# EAGLE board Panel (EAGLE 7.7.0)
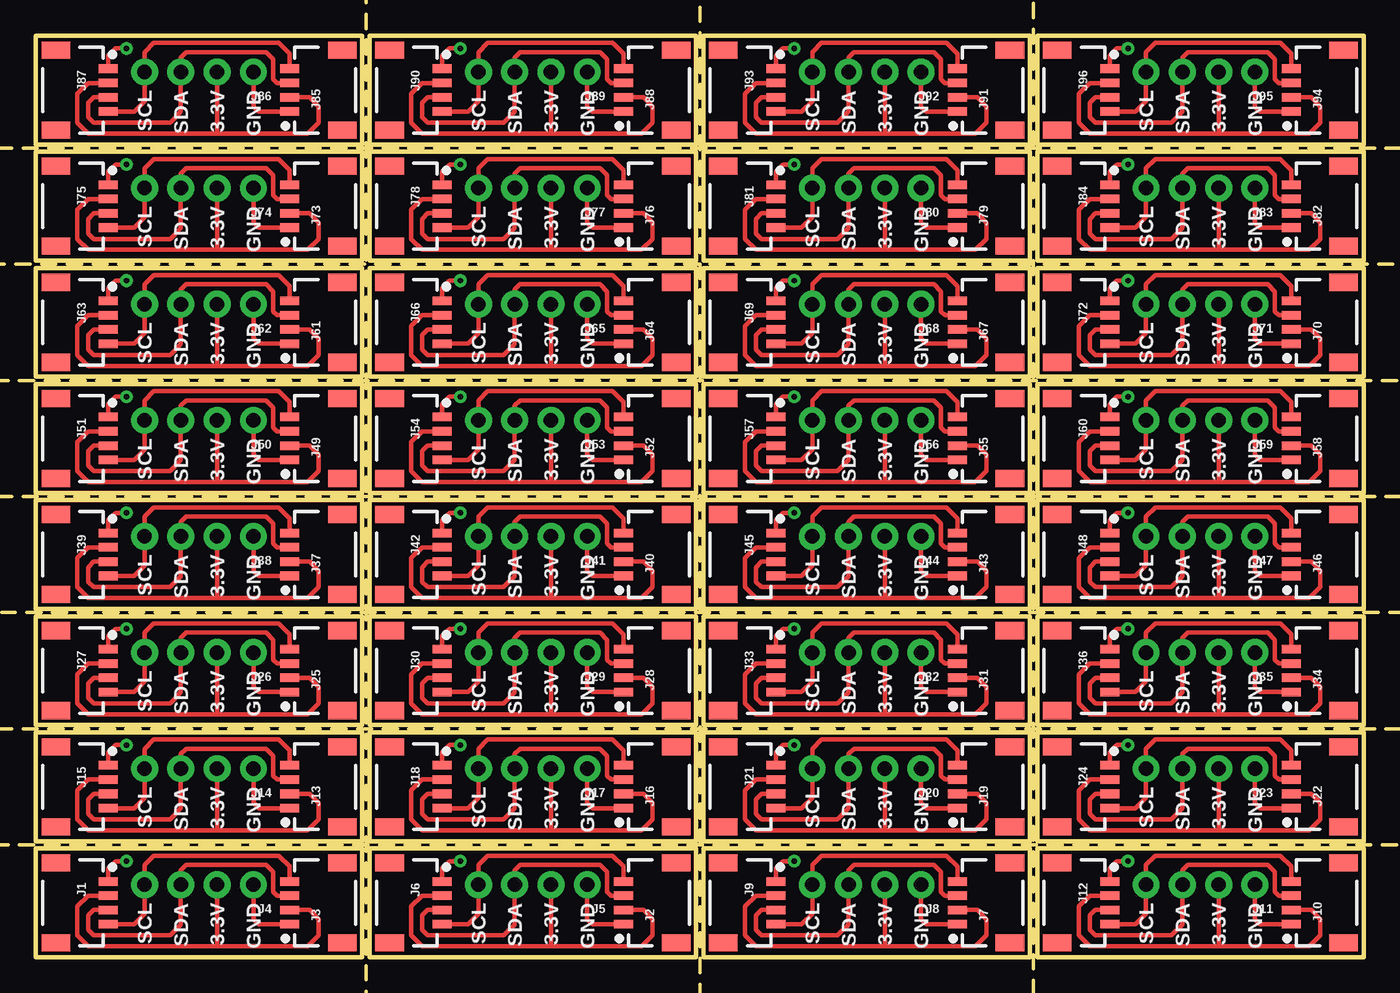
[diagram p0: board, top side]
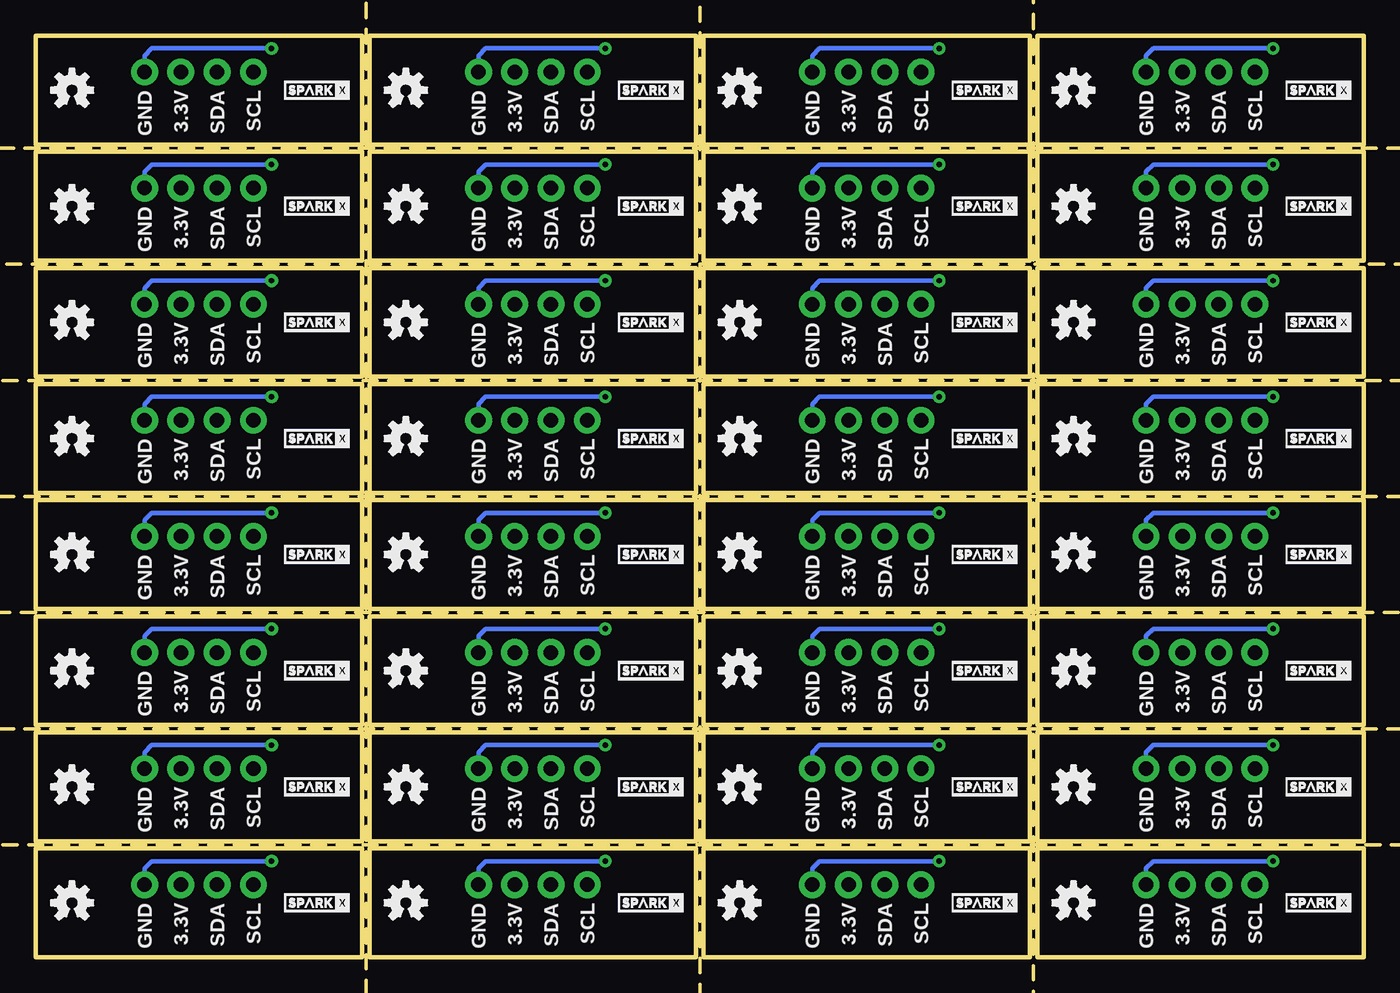
[diagram p1: board, bottom side, seen from below]

Size 92.96 x 64.52 mm. Coordinates in mm from the lower left corner, seen from the top.
Outline: 0,0 0,7.62 22.86,7.62 22.86,0 0,0
Outline: 23.37,0 23.37,7.62 46.23,7.62 46.23,0 23.37,0
Outline: 46.74,0 46.74,7.62 69.6,7.62 69.6,0 46.74,0
Outline: 70.1,0 70.1,7.62 92.96,7.62 92.96,0 70.1,0
Outline: 0,8.13 0,15.75 22.86,15.75 22.86,8.13 0,8.13
Outline: 23.37,8.13 23.37,15.75 46.23,15.75 46.23,8.13 23.37,8.13
Outline: 46.74,8.13 46.74,15.75 69.6,15.75 69.6,8.13 46.74,8.13
Outline: 70.1,8.13 70.1,15.75 92.96,15.75 92.96,8.13 70.1,8.13
Outline: 0,16.26 0,23.88 22.86,23.88 22.86,16.26 0,16.26
Outline: 23.37,16.26 23.37,23.88 46.23,23.88 46.23,16.26 23.37,16.26
Outline: 46.74,16.26 46.74,23.88 69.6,23.88 69.6,16.26 46.74,16.26
Outline: 70.1,16.26 70.1,23.88 92.96,23.88 92.96,16.26 70.1,16.26
Outline: 0,24.38 0,32 22.86,32 22.86,24.38 0,24.38
Outline: 23.37,24.38 23.37,32 46.23,32 46.23,24.38 23.37,24.38
Outline: 46.74,24.38 46.74,32 69.6,32 69.6,24.38 46.74,24.38
Outline: 70.1,24.38 70.1,32 92.96,32 92.96,24.38 70.1,24.38
Outline: 0,32.51 0,40.13 22.86,40.13 22.86,32.51 0,32.51
Outline: 23.37,32.51 23.37,40.13 46.23,40.13 46.23,32.51 23.37,32.51
Outline: 46.74,32.51 46.74,40.13 69.6,40.13 69.6,32.51 46.74,32.51
Outline: 70.1,32.51 70.1,40.13 92.96,40.13 92.96,32.51 70.1,32.51
Outline: 0,40.64 0,48.26 22.86,48.26 22.86,40.64 0,40.64
Outline: 23.37,40.64 23.37,48.26 46.23,48.26 46.23,40.64 23.37,40.64
Outline: 46.74,40.64 46.74,48.26 69.6,48.26 69.6,40.64 46.74,40.64
Outline: 70.1,40.64 70.1,48.26 92.96,48.26 92.96,40.64 70.1,40.64
Outline: 0,48.77 0,56.39 22.86,56.39 22.86,48.77 0,48.77
Outline: 23.37,48.77 23.37,56.39 46.23,56.39 46.23,48.77 23.37,48.77
Outline: 46.74,48.77 46.74,56.39 69.6,56.39 69.6,48.77 46.74,48.77
Outline: 70.1,48.77 70.1,56.39 92.96,56.39 92.96,48.77 70.1,48.77
Outline: 0,56.9 0,64.52 22.86,64.52 22.86,56.9 0,56.9
Outline: 23.37,56.9 23.37,64.52 46.23,64.52 46.23,56.9 23.37,56.9
Outline: 46.74,56.9 46.74,64.52 69.6,64.52 69.6,56.9 46.74,56.9
Outline: 70.1,56.9 70.1,64.52 92.96,64.52 92.96,56.9 70.1,56.9
Copper layers (1*16): Top 0.035mm / dielectric 1.5mm / Bottom 0.035mm
Design rules "SparkFun-2-layer-STANDARD": minimum track width 10mil, minimum drill 20mil, track to track 10mil, track to pad 8mil, pad to pad 8mil, via to via 10mil, smd to smd 8mil, copper to edge 8mil, drill to drill 8mil, minimum pad ring 10mil, minimum via ring 10mil, stop-mask expansion 4mil, vias tented up to drill 25mil, thermal gap 10mil
Milling: 607 lines

## Footprints (pad centres in the part's own frame; a part is rotated, then mirrored left to right if it is on the bottom)
1X04_1MM_RA = smd 0.6 x 1.35: 1 -1.5,0; 2 -0.5,0; 3 0.5,0; 4 1.5,0 | smd 1.2 x 2: NC1 2.8,-3.675; NC2 -2.8,-3.675
1X04_NO_SILK = drill 1.016 pad 1.88: 1 0,0; 2 2.54,0; 3 5.08,0; 4 7.62,0

## Placement (x,y rotation side)
J1  JST  [1X04_1MM_RA]  5.08,3.81 270 top
J2  JST  [1X04_1MM_RA]  41.15,3.81 90 top
J3  JST  [1X04_1MM_RA]  17.78,3.81 90 top
J4  PTH  [1X04_NO_SILK]  15.24,5.08 180 top
J5  PTH  [1X04_NO_SILK]  38.61,5.08 180 top
J6  JST  [1X04_1MM_RA]  28.45,3.81 270 top
J7  JST  [1X04_1MM_RA]  64.52,3.81 90 top
J8  PTH  [1X04_NO_SILK]  61.98,5.08 180 top
J9  JST  [1X04_1MM_RA]  51.82,3.81 270 top
J10  JST  [1X04_1MM_RA]  87.88,3.81 90 top
J11  PTH  [1X04_NO_SILK]  85.34,5.08 180 top
J12  JST  [1X04_1MM_RA]  75.18,3.81 270 top
J13  JST  [1X04_1MM_RA]  17.78,11.94 90 top
J14  PTH  [1X04_NO_SILK]  15.24,13.21 180 top
J15  JST  [1X04_1MM_RA]  5.08,11.94 270 top
J16  JST  [1X04_1MM_RA]  41.15,11.94 90 top
J17  PTH  [1X04_NO_SILK]  38.61,13.21 180 top
J18  JST  [1X04_1MM_RA]  28.45,11.94 270 top
J19  JST  [1X04_1MM_RA]  64.52,11.94 90 top
J20  PTH  [1X04_NO_SILK]  61.98,13.21 180 top
J21  JST  [1X04_1MM_RA]  51.82,11.94 270 top
J22  JST  [1X04_1MM_RA]  87.88,11.94 90 top
J23  PTH  [1X04_NO_SILK]  85.34,13.21 180 top
J24  JST  [1X04_1MM_RA]  75.18,11.94 270 top
J25  JST  [1X04_1MM_RA]  17.78,20.07 90 top
J26  PTH  [1X04_NO_SILK]  15.24,21.34 180 top
J27  JST  [1X04_1MM_RA]  5.08,20.07 270 top
J28  JST  [1X04_1MM_RA]  41.15,20.07 90 top
J29  PTH  [1X04_NO_SILK]  38.61,21.34 180 top
J30  JST  [1X04_1MM_RA]  28.45,20.07 270 top
J31  JST  [1X04_1MM_RA]  64.52,20.07 90 top
J32  PTH  [1X04_NO_SILK]  61.98,21.34 180 top
J33  JST  [1X04_1MM_RA]  51.82,20.07 270 top
J34  JST  [1X04_1MM_RA]  87.88,20.07 90 top
J35  PTH  [1X04_NO_SILK]  85.34,21.34 180 top
J36  JST  [1X04_1MM_RA]  75.18,20.07 270 top
J37  JST  [1X04_1MM_RA]  17.78,28.19 90 top
J38  PTH  [1X04_NO_SILK]  15.24,29.46 180 top
J39  JST  [1X04_1MM_RA]  5.08,28.19 270 top
J40  JST  [1X04_1MM_RA]  41.15,28.19 90 top
J41  PTH  [1X04_NO_SILK]  38.61,29.46 180 top
J42  JST  [1X04_1MM_RA]  28.45,28.19 270 top
J43  JST  [1X04_1MM_RA]  64.52,28.19 90 top
J44  PTH  [1X04_NO_SILK]  61.98,29.46 180 top
J45  JST  [1X04_1MM_RA]  51.82,28.19 270 top
J46  JST  [1X04_1MM_RA]  87.88,28.19 90 top
J47  PTH  [1X04_NO_SILK]  85.34,29.46 180 top
J48  JST  [1X04_1MM_RA]  75.18,28.19 270 top
J49  JST  [1X04_1MM_RA]  17.78,36.32 90 top
J50  PTH  [1X04_NO_SILK]  15.24,37.59 180 top
J51  JST  [1X04_1MM_RA]  5.08,36.32 270 top
J52  JST  [1X04_1MM_RA]  41.15,36.32 90 top
J53  PTH  [1X04_NO_SILK]  38.61,37.59 180 top
J54  JST  [1X04_1MM_RA]  28.45,36.32 270 top
J55  JST  [1X04_1MM_RA]  64.52,36.32 90 top
J56  PTH  [1X04_NO_SILK]  61.98,37.59 180 top
J57  JST  [1X04_1MM_RA]  51.82,36.32 270 top
J58  JST  [1X04_1MM_RA]  87.88,36.32 90 top
J59  PTH  [1X04_NO_SILK]  85.34,37.59 180 top
J60  JST  [1X04_1MM_RA]  75.18,36.32 270 top
J61  JST  [1X04_1MM_RA]  17.78,44.45 90 top
J62  PTH  [1X04_NO_SILK]  15.24,45.72 180 top
J63  JST  [1X04_1MM_RA]  5.08,44.45 270 top
J64  JST  [1X04_1MM_RA]  41.15,44.45 90 top
J65  PTH  [1X04_NO_SILK]  38.61,45.72 180 top
J66  JST  [1X04_1MM_RA]  28.45,44.45 270 top
J67  JST  [1X04_1MM_RA]  64.52,44.45 90 top
J68  PTH  [1X04_NO_SILK]  61.98,45.72 180 top
J69  JST  [1X04_1MM_RA]  51.82,44.45 270 top
J70  JST  [1X04_1MM_RA]  87.88,44.45 90 top
J71  PTH  [1X04_NO_SILK]  85.34,45.72 180 top
J72  JST  [1X04_1MM_RA]  75.18,44.45 270 top
J73  JST  [1X04_1MM_RA]  17.78,52.58 90 top
J74  PTH  [1X04_NO_SILK]  15.24,53.85 180 top
J75  JST  [1X04_1MM_RA]  5.08,52.58 270 top
J76  JST  [1X04_1MM_RA]  41.15,52.58 90 top
J77  PTH  [1X04_NO_SILK]  38.61,53.85 180 top
J78  JST  [1X04_1MM_RA]  28.45,52.58 270 top
J79  JST  [1X04_1MM_RA]  64.52,52.58 90 top
J80  PTH  [1X04_NO_SILK]  61.98,53.85 180 top
J81  JST  [1X04_1MM_RA]  51.82,52.58 270 top
J82  JST  [1X04_1MM_RA]  87.88,52.58 90 top
J83  PTH  [1X04_NO_SILK]  85.34,53.85 180 top
J84  JST  [1X04_1MM_RA]  75.18,52.58 270 top
J85  JST  [1X04_1MM_RA]  17.78,60.71 90 top
J86  PTH  [1X04_NO_SILK]  15.24,61.98 180 top
J87  JST  [1X04_1MM_RA]  5.08,60.71 270 top
J88  JST  [1X04_1MM_RA]  41.15,60.71 90 top
J89  PTH  [1X04_NO_SILK]  38.61,61.98 180 top
J90  JST  [1X04_1MM_RA]  28.45,60.71 270 top
J91  JST  [1X04_1MM_RA]  64.52,60.71 90 top
J92  PTH  [1X04_NO_SILK]  61.98,61.98 180 top
J93  JST  [1X04_1MM_RA]  51.82,60.71 270 top
J94  JST  [1X04_1MM_RA]  87.88,60.71 90 top
J95  PTH  [1X04_NO_SILK]  85.34,61.98 180 top
J96  JST  [1X04_1MM_RA]  75.18,60.71 270 top
LOGO1  OSHW-LOGOS  [OSHW-LOGO-S]  43.69,3.81 0 bottom
LOGO2  OSHW-LOGOS  [OSHW-LOGO-S]  67.06,3.81 0 bottom
LOGO3  OSHW-LOGOS  [OSHW-LOGO-S]  90.42,3.81 0 bottom
LOGO4  OSHW-LOGOS  [OSHW-LOGO-S]  20.32,3.81 0 bottom
LOGO5  OSHW-LOGOS  [OSHW-LOGO-S]  20.32,11.94 0 bottom
LOGO6  OSHW-LOGOS  [OSHW-LOGO-S]  43.69,11.94 0 bottom
LOGO7  OSHW-LOGOS  [OSHW-LOGO-S]  67.06,11.94 0 bottom
LOGO8  OSHW-LOGOS  [OSHW-LOGO-S]  90.42,11.94 0 bottom
LOGO9  OSHW-LOGOS  [OSHW-LOGO-S]  20.32,20.07 0 bottom
LOGO10  OSHW-LOGOS  [OSHW-LOGO-S]  43.69,20.07 0 bottom
LOGO11  OSHW-LOGOS  [OSHW-LOGO-S]  67.06,20.07 0 bottom
LOGO12  OSHW-LOGOS  [OSHW-LOGO-S]  90.42,20.07 0 bottom
LOGO13  OSHW-LOGOS  [OSHW-LOGO-S]  20.32,28.19 0 bottom
LOGO14  OSHW-LOGOS  [OSHW-LOGO-S]  43.69,28.19 0 bottom
LOGO15  OSHW-LOGOS  [OSHW-LOGO-S]  67.06,28.19 0 bottom
LOGO16  OSHW-LOGOS  [OSHW-LOGO-S]  90.42,28.19 0 bottom
LOGO17  OSHW-LOGOS  [OSHW-LOGO-S]  20.32,36.32 0 bottom
LOGO18  OSHW-LOGOS  [OSHW-LOGO-S]  43.69,36.32 0 bottom
LOGO19  OSHW-LOGOS  [OSHW-LOGO-S]  67.06,36.32 0 bottom
LOGO20  OSHW-LOGOS  [OSHW-LOGO-S]  90.42,36.32 0 bottom
LOGO21  OSHW-LOGOS  [OSHW-LOGO-S]  20.32,44.45 0 bottom
LOGO22  OSHW-LOGOS  [OSHW-LOGO-S]  43.69,44.45 0 bottom
LOGO23  OSHW-LOGOS  [OSHW-LOGO-S]  67.06,44.45 0 bottom
LOGO24  OSHW-LOGOS  [OSHW-LOGO-S]  90.42,44.45 0 bottom
LOGO25  OSHW-LOGOS  [OSHW-LOGO-S]  20.32,52.58 0 bottom
LOGO26  OSHW-LOGOS  [OSHW-LOGO-S]  43.69,52.58 0 bottom
LOGO27  OSHW-LOGOS  [OSHW-LOGO-S]  67.06,52.58 0 bottom
LOGO28  OSHW-LOGOS  [OSHW-LOGO-S]  90.42,52.58 0 bottom
LOGO29  OSHW-LOGOS  [OSHW-LOGO-S]  20.32,60.71 0 bottom
LOGO30  OSHW-LOGOS  [OSHW-LOGO-S]  43.69,60.71 0 bottom
LOGO31  OSHW-LOGOS  [OSHW-LOGO-S]  67.06,60.71 0 bottom
LOGO32  OSHW-LOGOS  [OSHW-LOGO-S]  90.42,60.71 0 bottom
U$1  SPARKX-LOGO2  [SPARKX-TINY]  3.17,3.81 0 bottom
U$2  SPARKX-LOGO2  [SPARKX-TINY]  26.54,3.81 0 bottom
U$3  SPARKX-LOGO2  [SPARKX-TINY]  49.91,3.81 0 bottom
U$4  SPARKX-LOGO2  [SPARKX-TINY]  73.28,3.81 0 bottom
U$5  SPARKX-LOGO2  [SPARKX-TINY]  3.17,11.94 0 bottom
U$6  SPARKX-LOGO2  [SPARKX-TINY]  26.54,11.94 0 bottom
U$7  SPARKX-LOGO2  [SPARKX-TINY]  49.91,11.94 0 bottom
U$8  SPARKX-LOGO2  [SPARKX-TINY]  73.28,11.94 0 bottom
U$9  SPARKX-LOGO2  [SPARKX-TINY]  3.17,20.07 0 bottom
U$10  SPARKX-LOGO2  [SPARKX-TINY]  26.54,20.07 0 bottom
U$11  SPARKX-LOGO2  [SPARKX-TINY]  49.91,20.07 0 bottom
U$12  SPARKX-LOGO2  [SPARKX-TINY]  73.28,20.07 0 bottom
U$13  SPARKX-LOGO2  [SPARKX-TINY]  3.17,28.19 0 bottom
U$14  SPARKX-LOGO2  [SPARKX-TINY]  26.54,28.19 0 bottom
U$15  SPARKX-LOGO2  [SPARKX-TINY]  49.91,28.19 0 bottom
U$16  SPARKX-LOGO2  [SPARKX-TINY]  73.28,28.19 0 bottom
U$17  SPARKX-LOGO2  [SPARKX-TINY]  3.17,36.32 0 bottom
U$18  SPARKX-LOGO2  [SPARKX-TINY]  26.54,36.32 0 bottom
U$19  SPARKX-LOGO2  [SPARKX-TINY]  49.91,36.32 0 bottom
U$20  SPARKX-LOGO2  [SPARKX-TINY]  73.28,36.32 0 bottom
U$21  SPARKX-LOGO2  [SPARKX-TINY]  3.17,44.45 0 bottom
U$22  SPARKX-LOGO2  [SPARKX-TINY]  26.54,44.45 0 bottom
U$23  SPARKX-LOGO2  [SPARKX-TINY]  49.91,44.45 0 bottom
U$24  SPARKX-LOGO2  [SPARKX-TINY]  73.28,44.45 0 bottom
U$25  SPARKX-LOGO2  [SPARKX-TINY]  3.17,52.58 0 bottom
U$26  SPARKX-LOGO2  [SPARKX-TINY]  26.54,52.58 0 bottom
U$27  SPARKX-LOGO2  [SPARKX-TINY]  49.91,52.58 0 bottom
U$28  SPARKX-LOGO2  [SPARKX-TINY]  73.28,52.58 0 bottom
U$29  SPARKX-LOGO2  [SPARKX-TINY]  3.17,60.71 0 bottom
U$30  SPARKX-LOGO2  [SPARKX-TINY]  26.54,60.71 0 bottom
U$31  SPARKX-LOGO2  [SPARKX-TINY]  49.91,60.71 0 bottom
U$32  SPARKX-LOGO2  [SPARKX-TINY]  73.28,60.71 0 bottom

## Library data of the parts
J1-J96 U$1-U$32 = SparkX
LOGO1-LOGO32 = SparkFun-Aesthetics

## Nets
3.3V: J1.2 J3.2 J4.2
3.3V1: J2.2 J5.2 J6.2
3.3V2: J7.2 J8.2 J9.2
3.3V3: J10.2 J11.2 J12.2
3.3V4: J13.2 J14.2 J15.2
3.3V5: J16.2 J17.2 J18.2
3.3V6: J19.2 J20.2 J21.2
3.3V7: J22.2 J23.2 J24.2
3.3V8: J25.2 J26.2 J27.2
3.3V9: J28.2 J29.2 J30.2
3.3V10: J31.2 J32.2 J33.2
3.3V11: J34.2 J35.2 J36.2
3.3V12: J37.2 J38.2 J39.2
3.3V13: J40.2 J41.2 J42.2
3.3V14: J43.2 J44.2 J45.2
3.3V15: J46.2 J47.2 J48.2
3.3V16: J49.2 J50.2 J51.2
3.3V17: J52.2 J53.2 J54.2
3.3V18: J55.2 J56.2 J57.2
3.3V19: J58.2 J59.2 J60.2
3.3V20: J61.2 J62.2 J63.2
3.3V21: J64.2 J65.2 J66.2
3.3V22: J67.2 J68.2 J69.2
3.3V23: J70.2 J71.2 J72.2
3.3V24: J73.2 J74.2 J75.2
3.3V25: J76.2 J77.2 J78.2
3.3V26: J79.2 J80.2 J81.2
3.3V27: J82.2 J83.2 J84.2
3.3V28: J85.2 J86.2 J87.2
3.3V29: J88.2 J89.2 J90.2
3.3V30: J91.2 J92.2 J93.2
3.3V31: J94.2 J95.2 J96.2
GND: J1.1 J3.1 J4.1
GND1: J2.1 J5.1 J6.1
GND2: J7.1 J8.1 J9.1
GND3: J10.1 J11.1 J12.1
GND4: J13.1 J14.1 J15.1
GND5: J16.1 J17.1 J18.1
GND6: J19.1 J20.1 J21.1
GND7: J22.1 J23.1 J24.1
GND8: J25.1 J26.1 J27.1
GND9: J28.1 J29.1 J30.1
GND10: J31.1 J32.1 J33.1
GND11: J34.1 J35.1 J36.1
GND12: J37.1 J38.1 J39.1
GND13: J40.1 J41.1 J42.1
GND14: J43.1 J44.1 J45.1
GND15: J46.1 J47.1 J48.1
GND16: J49.1 J50.1 J51.1
GND17: J52.1 J53.1 J54.1
GND18: J55.1 J56.1 J57.1
GND19: J58.1 J59.1 J60.1
GND20: J61.1 J62.1 J63.1
GND21: J64.1 J65.1 J66.1
GND22: J67.1 J68.1 J69.1
GND23: J70.1 J71.1 J72.1
GND24: J73.1 J74.1 J75.1
GND25: J76.1 J77.1 J78.1
GND26: J79.1 J80.1 J81.1
GND27: J82.1 J83.1 J84.1
GND28: J85.1 J86.1 J87.1
GND29: J88.1 J89.1 J90.1
GND30: J91.1 J92.1 J93.1
GND31: J94.1 J95.1 J96.1
SCL: J1.4 J3.4 J4.4
SCL1: J2.4 J5.4 J6.4
SCL2: J7.4 J8.4 J9.4
SCL3: J10.4 J11.4 J12.4
SCL4: J13.4 J14.4 J15.4
SCL5: J16.4 J17.4 J18.4
SCL6: J19.4 J20.4 J21.4
SCL7: J22.4 J23.4 J24.4
SCL8: J25.4 J26.4 J27.4
SCL9: J28.4 J29.4 J30.4
SCL10: J31.4 J32.4 J33.4
SCL11: J34.4 J35.4 J36.4
SCL12: J37.4 J38.4 J39.4
SCL13: J40.4 J41.4 J42.4
SCL14: J43.4 J44.4 J45.4
SCL15: J46.4 J47.4 J48.4
SCL16: J49.4 J50.4 J51.4
SCL17: J52.4 J53.4 J54.4
SCL18: J55.4 J56.4 J57.4
SCL19: J58.4 J59.4 J60.4
SCL20: J61.4 J62.4 J63.4
SCL21: J64.4 J65.4 J66.4
SCL22: J67.4 J68.4 J69.4
SCL23: J70.4 J71.4 J72.4
SCL24: J73.4 J74.4 J75.4
SCL25: J76.4 J77.4 J78.4
SCL26: J79.4 J80.4 J81.4
SCL27: J82.4 J83.4 J84.4
SCL28: J85.4 J86.4 J87.4
SCL29: J88.4 J89.4 J90.4
SCL30: J91.4 J92.4 J93.4
SCL31: J94.4 J95.4 J96.4
SDA: J1.3 J3.3 J4.3
SDA1: J2.3 J5.3 J6.3
SDA2: J7.3 J8.3 J9.3
SDA3: J10.3 J11.3 J12.3
SDA4: J13.3 J14.3 J15.3
SDA5: J16.3 J17.3 J18.3
SDA6: J19.3 J20.3 J21.3
SDA7: J22.3 J23.3 J24.3
SDA8: J25.3 J26.3 J27.3
SDA9: J28.3 J29.3 J30.3
SDA10: J31.3 J32.3 J33.3
SDA11: J34.3 J35.3 J36.3
SDA12: J37.3 J38.3 J39.3
SDA13: J40.3 J41.3 J42.3
SDA14: J43.3 J44.3 J45.3
SDA15: J46.3 J47.3 J48.3
SDA16: J49.3 J50.3 J51.3
SDA17: J52.3 J53.3 J54.3
SDA18: J55.3 J56.3 J57.3
SDA19: J58.3 J59.3 J60.3
SDA20: J61.3 J62.3 J63.3
SDA21: J64.3 J65.3 J66.3
SDA22: J67.3 J68.3 J69.3
SDA23: J70.3 J71.3 J72.3
SDA24: J73.3 J74.3 J75.3
SDA25: J76.3 J77.3 J78.3
SDA26: J79.3 J80.3 J81.3
SDA27: J82.3 J83.3 J84.3
SDA28: J85.3 J86.3 J87.3
SDA29: J88.3 J89.3 J90.3
SDA30: J91.3 J92.3 J93.3
SDA31: J94.3 J95.3 J96.3

## Tracks (layer width: path | path; a pad name or v marks a point on that pad's centre or on a via)
3.3V
  Top 0.305: J1.2 3.67,4.31 2.92,3.56 2.92,1.52 3.68,0.76 12.7,0.76 | 12.7,0.76 19.05,0.76 19.81,1.52 19.81,2.67 19.17,3.31 J3.2 | J4.2 12.7,3.3 | 12.71,3.31 12.7,3.3 | 12.7,3.3 12.7,0.76
3.3V1
  Top 0.305: J6.2 27.04,4.31 26.29,3.56 26.29,1.52 27.05,0.76 36.07,0.76 | 36.07,0.76 42.42,0.76 43.18,1.52 43.18,2.67 42.54,3.31 J2.2 | J5.2 36.07,3.3 | 36.08,3.31 36.07,3.3 | 36.07,3.3 36.07,0.76
3.3V2
  Top 0.305: J9.2 50.41,4.31 49.66,3.56 49.66,1.52 50.42,0.76 59.44,0.76 | 59.44,0.76 65.79,0.76 66.55,1.52 66.55,2.67 65.91,3.31 J7.2 | J8.2 59.44,3.3 | 59.44,3.31 59.44,3.3 | 59.44,3.3 59.44,0.76
3.3V3
  Top 0.305: J12.2 73.78,4.31 73.03,3.56 73.03,1.52 73.79,0.76 82.8,0.76 | 82.8,0.76 89.15,0.76 89.92,1.52 89.92,2.67 89.27,3.31 J10.2 | J11.2 82.8,3.3 | 82.81,3.31 82.8,3.3 | 82.8,3.3 82.8,0.76
3.3V4
  Top 0.305: J15.2 3.67,12.44 2.92,11.68 2.92,9.65 3.68,8.89 12.7,8.89 | 12.7,8.89 19.05,8.89 19.81,9.65 19.81,10.79 19.17,11.44 J13.2 | J14.2 12.7,11.43 | 12.71,11.44 12.7,11.43 | 12.7,11.43 12.7,8.89
3.3V5
  Top 0.305: J18.2 27.04,12.44 26.29,11.68 26.29,9.65 27.05,8.89 36.07,8.89 | 36.07,8.89 42.42,8.89 43.18,9.65 43.18,10.79 42.54,11.44 J16.2 | J17.2 36.07,11.43 | 36.08,11.44 36.07,11.43 | 36.07,11.43 36.07,8.89
3.3V6
  Top 0.305: J21.2 50.41,12.44 49.66,11.68 49.66,9.65 50.42,8.89 59.44,8.89 | 59.44,8.89 65.79,8.89 66.55,9.65 66.55,10.79 65.91,11.44 J19.2 | J20.2 59.44,11.43 | 59.44,11.44 59.44,11.43 | 59.44,11.43 59.44,8.89
3.3V7
  Top 0.305: J24.2 73.78,12.44 73.03,11.68 73.03,9.65 73.79,8.89 82.8,8.89 | 82.8,8.89 89.15,8.89 89.92,9.65 89.92,10.79 89.27,11.44 J22.2 | J23.2 82.8,11.43 | 82.81,11.44 82.8,11.43 | 82.8,11.43 82.8,8.89
3.3V8
  Top 0.305: J27.2 3.67,20.57 2.92,19.81 2.92,17.78 3.68,17.02 12.7,17.02 | 12.7,17.02 19.05,17.02 19.81,17.78 19.81,18.92 19.17,19.57 J25.2 | J26.2 12.7,19.56 | 12.71,19.57 12.7,19.56 | 12.7,19.56 12.7,17.02
3.3V9
  Top 0.305: J30.2 27.04,20.57 26.29,19.81 26.29,17.78 27.05,17.02 36.07,17.02 | 36.07,17.02 42.42,17.02 43.18,17.78 43.18,18.92 42.54,19.57 J28.2 | J29.2 36.07,19.56 | 36.08,19.57 36.07,19.56 | 36.07,19.56 36.07,17.02
3.3V10
  Top 0.305: J33.2 50.41,20.57 49.66,19.81 49.66,17.78 50.42,17.02 59.44,17.02 | 59.44,17.02 65.79,17.02 66.55,17.78 66.55,18.92 65.91,19.57 J31.2 | J32.2 59.44,19.56 | 59.44,19.57 59.44,19.56 | 59.44,19.56 59.44,17.02
3.3V11
  Top 0.305: J36.2 73.78,20.57 73.03,19.81 73.03,17.78 73.79,17.02 82.8,17.02 | 82.8,17.02 89.15,17.02 89.92,17.78 89.92,18.92 89.27,19.57 J34.2 | J35.2 82.8,19.56 | 82.81,19.57 82.8,19.56 | 82.8,19.56 82.8,17.02
3.3V12
  Top 0.305: J39.2 3.67,28.69 2.92,27.94 2.92,25.91 3.68,25.15 12.7,25.15 | 12.7,25.15 19.05,25.15 19.81,25.91 19.81,27.05 19.17,27.69 J37.2 | J38.2 12.7,27.69 | 12.71,27.69 12.7,27.69 | 12.7,27.69 12.7,25.15
3.3V13
  Top 0.305: J42.2 27.04,28.69 26.29,27.94 26.29,25.91 27.05,25.15 36.07,25.15 | 36.07,25.15 42.42,25.15 43.18,25.91 43.18,27.05 42.54,27.69 J40.2 | J41.2 36.07,27.69 | 36.08,27.69 36.07,27.69 | 36.07,27.69 36.07,25.15
3.3V14
  Top 0.305: J45.2 50.41,28.69 49.66,27.94 49.66,25.91 50.42,25.15 59.44,25.15 | 59.44,25.15 65.79,25.15 66.55,25.91 66.55,27.05 65.91,27.69 J43.2 | J44.2 59.44,27.69 | 59.44,27.69 | 59.44,27.69 59.44,25.15
3.3V15
  Top 0.305: J48.2 73.78,28.69 73.03,27.94 73.03,25.91 73.79,25.15 82.8,25.15 | 82.8,25.15 89.15,25.15 89.92,25.91 89.92,27.05 89.27,27.69 J46.2 | J47.2 82.8,27.69 | 82.81,27.69 82.8,27.69 | 82.8,27.69 82.8,25.15
3.3V16
  Top 0.305: J51.2 3.67,36.82 2.92,36.07 2.92,34.04 3.68,33.27 12.7,33.27 | 12.7,33.27 19.05,33.27 19.81,34.04 19.81,35.18 19.17,35.82 J49.2 | J50.2 12.7,35.81 | 12.71,35.82 12.7,35.81 | 12.7,35.81 12.7,33.27
3.3V17
  Top 0.305: J54.2 27.04,36.82 26.29,36.07 26.29,34.04 27.05,33.27 36.07,33.27 | 36.07,33.27 42.42,33.27 43.18,34.04 43.18,35.18 42.54,35.82 J52.2 | J53.2 36.07,35.81 | 36.08,35.82 36.07,35.81 | 36.07,35.81 36.07,33.27
3.3V18
  Top 0.305: J57.2 50.41,36.82 49.66,36.07 49.66,34.04 50.42,33.27 59.44,33.27 | 59.44,33.27 65.79,33.27 66.55,34.04 66.55,35.18 65.91,35.82 J55.2 | J56.2 59.44,35.81 | 59.44,35.82 59.44,35.81 | 59.44,35.81 59.44,33.27
3.3V19
  Top 0.305: J60.2 73.78,36.82 73.03,36.07 73.03,34.04 73.79,33.27 82.8,33.27 | 82.8,33.27 89.15,33.27 89.92,34.04 89.92,35.18 89.27,35.82 J58.2 | J59.2 82.8,35.81 | 82.81,35.82 82.8,35.81 | 82.8,35.81 82.8,33.27
3.3V20
  Top 0.305: J63.2 3.67,44.95 2.92,44.2 2.92,42.16 3.68,41.4 12.7,41.4 | 12.7,41.4 19.05,41.4 19.81,42.16 19.81,43.31 19.17,43.95 J61.2 | J62.2 12.7,43.94 | 12.71,43.95 12.7,43.94 | 12.7,43.94 12.7,41.4
3.3V21
  Top 0.305: J66.2 27.04,44.95 26.29,44.2 26.29,42.16 27.05,41.4 36.07,41.4 | 36.07,41.4 42.42,41.4 43.18,42.16 43.18,43.31 42.54,43.95 J64.2 | J65.2 36.07,43.94 | 36.08,43.95 36.07,43.94 | 36.07,43.94 36.07,41.4
3.3V22
  Top 0.305: J69.2 50.41,44.95 49.66,44.2 49.66,42.16 50.42,41.4 59.44,41.4 | 59.44,41.4 65.79,41.4 66.55,42.16 66.55,43.31 65.91,43.95 J67.2 | J68.2 59.44,43.94 | 59.44,43.95 59.44,43.94 | 59.44,43.94 59.44,41.4
3.3V23
  Top 0.305: J72.2 73.78,44.95 73.03,44.2 73.03,42.16 73.79,41.4 82.8,41.4 | 82.8,41.4 89.15,41.4 89.92,42.16 89.92,43.31 89.27,43.95 J70.2 | J71.2 82.8,43.94 | 82.81,43.95 82.8,43.94 | 82.8,43.94 82.8,41.4
3.3V24
  Top 0.305: J75.2 3.67,53.08 2.92,52.32 2.92,50.29 3.68,49.53 12.7,49.53 | 12.7,49.53 19.05,49.53 19.81,50.29 19.81,51.44 19.17,52.08 J73.2 | J74.2 12.7,52.07 | 12.71,52.08 12.7,52.07 | 12.7,52.07 12.7,49.53
3.3V25
  Top 0.305: J78.2 27.04,53.08 26.29,52.32 26.29,50.29 27.05,49.53 36.07,49.53 | 36.07,49.53 42.42,49.53 43.18,50.29 43.18,51.44 42.54,52.08 J76.2 | J77.2 36.07,52.07 | 36.08,52.08 36.07,52.07 | 36.07,52.07 36.07,49.53
3.3V26
  Top 0.305: J81.2 50.41,53.08 49.66,52.32 49.66,50.29 50.42,49.53 59.44,49.53 | 59.44,49.53 65.79,49.53 66.55,50.29 66.55,51.44 65.91,52.08 J79.2 | J80.2 59.44,52.07 | 59.44,52.08 59.44,52.07 | 59.44,52.07 59.44,49.53
3.3V27
  Top 0.305: J84.2 73.78,53.08 73.03,52.32 73.03,50.29 73.79,49.53 82.8,49.53 | 82.8,49.53 89.15,49.53 89.92,50.29 89.92,51.44 89.27,52.08 J82.2 | J83.2 82.8,52.07 | 82.81,52.08 82.8,52.07 | 82.8,52.07 82.8,49.53
3.3V28
  Top 0.305: J87.2 3.67,61.21 2.92,60.45 2.92,58.42 3.68,57.66 12.7,57.66 | 12.7,57.66 19.05,57.66 19.81,58.42 19.81,59.56 19.17,60.21 J85.2 | J86.2 12.7,60.2 | 12.71,60.21 12.7,60.2 | 12.7,60.2 12.7,57.66
3.3V29
  Top 0.305: J90.2 27.04,61.21 26.29,60.45 26.29,58.42 27.05,57.66 36.07,57.66 | 36.07,57.66 42.42,57.66 43.18,58.42 43.18,59.56 42.54,60.21 J88.2 | J89.2 36.07,60.2 | 36.08,60.21 36.07,60.2 | 36.07,60.2 36.07,57.66
3.3V30
  Top 0.305: J93.2 50.41,61.21 49.66,60.45 49.66,58.42 50.42,57.66 59.44,57.66 | 59.44,57.66 65.79,57.66 66.55,58.42 66.55,59.56 65.91,60.21 J91.2 | J92.2 59.44,60.2 | 59.44,60.21 59.44,60.2 | 59.44,60.2 59.44,57.66
3.3V31
  Top 0.305: J96.2 73.78,61.21 73.03,60.45 73.03,58.42 73.79,57.66 82.8,57.66 | 82.8,57.66 89.15,57.66 89.92,58.42 89.92,59.56 89.27,60.21 J94.2 | J95.2 82.8,60.2 | 82.81,60.21 82.8,60.2 | 82.8,60.2 82.8,57.66
GND  (via drill 0.38)
  Top 0.305: J3.1 15.6,2.31 15.24,2.67 J4.1 | J1.1 5.08,6.22 5.59,6.73 v6.35,6.73
  Bottom 0.305: v6.35,6.73 14.73,6.73 15.24,6.22 J4.1
GND1  (via drill 0.38)
  Top 0.305: J2.1 38.97,2.31 38.61,2.67 J5.1 | J6.1 28.45,6.22 28.96,6.73 v29.72,6.73
  Bottom 0.305: v29.72,6.73 38.1,6.73 38.61,6.22 J5.1
GND2  (via drill 0.38)
  Top 0.305: J7.1 62.33,2.31 61.98,2.67 J8.1 | J9.1 51.82,6.22 52.32,6.73 v53.09,6.73
  Bottom 0.305: v53.09,6.73 61.47,6.73 61.98,6.22 J8.1
GND3  (via drill 0.38)
  Top 0.305: J10.1 85.7,2.31 85.34,2.67 J11.1 | J12.1 75.18,6.22 75.69,6.73 v76.45,6.73
  Bottom 0.305: v76.45,6.73 84.84,6.73 85.34,6.22 J11.1
GND4  (via drill 0.38)
  Top 0.305: J13.1 15.6,10.44 15.24,10.79 J14.1 | J15.1 5.08,14.35 5.59,14.86 v6.35,14.86
  Bottom 0.305: v6.35,14.86 14.73,14.86 15.24,14.35 J14.1
GND5  (via drill 0.38)
  Top 0.305: J16.1 38.97,10.44 38.61,10.79 J17.1 | J18.1 28.45,14.35 28.96,14.86 v29.72,14.86
  Bottom 0.305: v29.72,14.86 38.1,14.86 38.61,14.35 J17.1
GND6  (via drill 0.38)
  Top 0.305: J19.1 62.33,10.44 61.98,10.79 J20.1 | J21.1 51.82,14.35 52.32,14.86 v53.09,14.86
  Bottom 0.305: v53.09,14.86 61.47,14.86 61.98,14.35 J20.1
GND7  (via drill 0.38)
  Top 0.305: J22.1 85.7,10.44 85.34,10.79 J23.1 | J24.1 75.18,14.35 75.69,14.86 v76.45,14.86
  Bottom 0.305: v76.45,14.86 84.84,14.86 85.34,14.35 J23.1
GND8  (via drill 0.38)
  Top 0.305: J25.1 15.6,18.57 15.24,18.92 J26.1 | J27.1 5.08,22.48 5.59,22.99 v6.35,22.99
  Bottom 0.305: v6.35,22.99 14.73,22.99 15.24,22.48 J26.1
GND9  (via drill 0.38)
  Top 0.305: J28.1 38.97,18.57 38.61,18.92 J29.1 | J30.1 28.45,22.48 28.96,22.99 v29.72,22.99
  Bottom 0.305: v29.72,22.99 38.1,22.99 38.61,22.48 J29.1
GND10  (via drill 0.38)
  Top 0.305: J31.1 62.33,18.57 61.98,18.92 J32.1 | J33.1 51.82,22.48 52.32,22.99 v53.09,22.99
  Bottom 0.305: v53.09,22.99 61.47,22.99 61.98,22.48 J32.1
GND11  (via drill 0.38)
  Top 0.305: J34.1 85.7,18.57 85.34,18.92 J35.1 | J36.1 75.18,22.48 75.69,22.99 v76.45,22.99
  Bottom 0.305: v76.45,22.99 84.84,22.99 85.34,22.48 J35.1
GND12  (via drill 0.38)
  Top 0.305: J37.1 15.6,26.69 15.24,27.05 J38.1 | J39.1 5.08,30.61 5.59,31.11 v6.35,31.11
  Bottom 0.305: v6.35,31.11 14.73,31.11 15.24,30.61 J38.1
GND13  (via drill 0.38)
  Top 0.305: J40.1 38.97,26.69 38.61,27.05 J41.1 | J42.1 28.45,30.61 28.96,31.11 v29.72,31.11
  Bottom 0.305: v29.72,31.11 38.1,31.11 38.61,30.61 J41.1
GND14  (via drill 0.38)
  Top 0.305: J43.1 62.33,26.69 61.98,27.05 J44.1 | J45.1 51.82,30.61 52.32,31.11 v53.09,31.11
  Bottom 0.305: v53.09,31.11 61.47,31.11 61.98,30.61 J44.1
GND15  (via drill 0.38)
  Top 0.305: J46.1 85.7,26.69 85.34,27.05 J47.1 | J48.1 75.18,30.61 75.69,31.11 v76.45,31.11
  Bottom 0.305: v76.45,31.11 84.84,31.11 85.34,30.61 J47.1
GND16  (via drill 0.38)
  Top 0.305: J49.1 15.6,34.82 15.24,35.18 J50.1 | J51.1 5.08,38.73 5.59,39.24 v6.35,39.24
  Bottom 0.305: v6.35,39.24 14.73,39.24 15.24,38.73 J50.1
GND17  (via drill 0.38)
  Top 0.305: J52.1 38.97,34.82 38.61,35.18 J53.1 | J54.1 28.45,38.73 28.96,39.24 v29.72,39.24
  Bottom 0.305: v29.72,39.24 38.1,39.24 38.61,38.73 J53.1
GND18  (via drill 0.38)
  Top 0.305: J55.1 62.33,34.82 61.98,35.18 J56.1 | J57.1 51.82,38.73 52.32,39.24 v53.09,39.24
  Bottom 0.305: v53.09,39.24 61.47,39.24 61.98,38.73 J56.1
GND19  (via drill 0.38)
  Top 0.305: J58.1 85.7,34.82 85.34,35.18 J59.1 | J60.1 75.18,38.73 75.69,39.24 v76.45,39.24
  Bottom 0.305: v76.45,39.24 84.84,39.24 85.34,38.73 J59.1
GND20  (via drill 0.38)
  Top 0.305: J61.1 15.6,42.95 15.24,43.31 J62.1 | J63.1 5.08,46.86 5.59,47.37 v6.35,47.37
  Bottom 0.305: v6.35,47.37 14.73,47.37 15.24,46.86 J62.1
GND21  (via drill 0.38)
  Top 0.305: J64.1 38.97,42.95 38.61,43.31 J65.1 | J66.1 28.45,46.86 28.96,47.37 v29.72,47.37
  Bottom 0.305: v29.72,47.37 38.1,47.37 38.61,46.86 J65.1
GND22  (via drill 0.38)
  Top 0.305: J67.1 62.33,42.95 61.98,43.31 J68.1 | J69.1 51.82,46.86 52.32,47.37 v53.09,47.37
  Bottom 0.305: v53.09,47.37 61.47,47.37 61.98,46.86 J68.1
GND23  (via drill 0.38)
  Top 0.305: J70.1 85.7,42.95 85.34,43.31 J71.1 | J72.1 75.18,46.86 75.69,47.37 v76.45,47.37
  Bottom 0.305: v76.45,47.37 84.84,47.37 85.34,46.86 J71.1
GND24  (via drill 0.38)
  Top 0.305: J73.1 15.6,51.08 15.24,51.44 J74.1 | J75.1 5.08,54.99 5.59,55.5 v6.35,55.5
  Bottom 0.305: v6.35,55.5 14.73,55.5 15.24,54.99 J74.1
GND25  (via drill 0.38)
  Top 0.305: J76.1 38.97,51.08 38.61,51.44 J77.1 | J78.1 28.45,54.99 28.96,55.5 v29.72,55.5
  Bottom 0.305: v29.72,55.5 38.1,55.5 38.61,54.99 J77.1
GND26  (via drill 0.38)
  Top 0.305: J79.1 62.33,51.08 61.98,51.44 J80.1 | J81.1 51.82,54.99 52.32,55.5 v53.09,55.5
  Bottom 0.305: v53.09,55.5 61.47,55.5 61.98,54.99 J80.1
GND27  (via drill 0.38)
  Top 0.305: J82.1 85.7,51.08 85.34,51.44 J83.1 | J84.1 75.18,54.99 75.69,55.5 v76.45,55.5
  Bottom 0.305: v76.45,55.5 84.84,55.5 85.34,54.99 J83.1
GND28  (via drill 0.38)
  Top 0.305: J85.1 15.6,59.21 15.24,59.56 J86.1 | J87.1 5.08,63.12 5.59,63.63 v6.35,63.63
  Bottom 0.305: v6.35,63.63 14.73,63.63 15.24,63.12 J86.1
GND29  (via drill 0.38)
  Top 0.305: J88.1 38.97,59.21 38.61,59.56 J89.1 | J90.1 28.45,63.12 28.96,63.63 v29.72,63.63
  Bottom 0.305: v29.72,63.63 38.1,63.63 38.61,63.12 J89.1
GND30  (via drill 0.38)
  Top 0.305: J91.1 62.33,59.21 61.98,59.56 J92.1 | J93.1 51.82,63.12 52.32,63.63 v53.09,63.63
  Bottom 0.305: v53.09,63.63 61.47,63.63 61.98,63.12 J92.1
GND31  (via drill 0.38)
  Top 0.305: J94.1 85.7,59.21 85.34,59.56 J95.1 | J96.1 75.18,63.12 75.69,63.63 v76.45,63.63
  Bottom 0.305: v76.45,63.63 84.84,63.63 85.34,63.12 J95.1
SCL
  Top 0.305: J3.4 17.78,6.35 17.02,7.11 8.26,7.11 7.62,6.48 J4.4 7.62,3.05 6.88,2.31 J1.4
SCL1
  Top 0.305: J2.4 41.15,6.35 40.39,7.11 31.62,7.11 30.99,6.48 J5.4 30.99,3.05 30.25,2.31 J6.4
SCL2
  Top 0.305: J7.4 64.52,6.35 63.75,7.11 54.99,7.11 54.36,6.48 J8.4 54.36,3.05 53.62,2.31 J9.4
SCL3
  Top 0.305: J10.4 87.88,6.35 87.12,7.11 78.36,7.11 77.72,6.48 J11.4 77.72,3.05 76.99,2.31 J12.4
SCL4
  Top 0.305: J13.4 17.78,14.48 17.02,15.24 8.26,15.24 7.62,14.61 J14.4 7.62,11.18 6.88,10.44 J15.4
SCL5
  Top 0.305: J16.4 41.15,14.48 40.39,15.24 31.62,15.24 30.99,14.61 J17.4 30.99,11.18 30.25,10.44 J18.4
SCL6
  Top 0.305: J19.4 64.52,14.48 63.75,15.24 54.99,15.24 54.36,14.61 J20.4 54.36,11.18 53.62,10.44 J21.4
SCL7
  Top 0.305: J22.4 87.88,14.48 87.12,15.24 78.36,15.24 77.72,14.61 J23.4 77.72,11.18 76.99,10.44 J24.4
SCL8
  Top 0.305: J25.4 17.78,22.61 17.02,23.37 8.26,23.37 7.62,22.73 J26.4 7.62,19.3 6.88,18.57 J27.4
SCL9
  Top 0.305: J28.4 41.15,22.61 40.39,23.37 31.62,23.37 30.99,22.73 J29.4 30.99,19.3 30.25,18.57 J30.4
SCL10
  Top 0.305: J31.4 64.52,22.61 63.75,23.37 54.99,23.37 54.36,22.73 J32.4 54.36,19.3 53.62,18.57 J33.4
SCL11
  Top 0.305: J34.4 87.88,22.61 87.12,23.37 78.36,23.37 77.72,22.73 J35.4 77.72,19.3 76.99,18.57 J36.4
SCL12
  Top 0.305: J37.4 17.78,30.73 17.02,31.5 8.26,31.5 7.62,30.86 J38.4 7.62,27.43 6.88,26.69 J39.4
SCL13
  Top 0.305: J40.4 41.15,30.73 40.39,31.5 31.62,31.5 30.99,30.86 J41.4 30.99,27.43 30.25,26.69 J42.4
SCL14
  Top 0.305: J43.4 64.52,30.73 63.75,31.5 54.99,31.5 54.36,30.86 J44.4 54.36,27.43 53.62,26.69 J45.4
SCL15
  Top 0.305: J46.4 87.88,30.73 87.12,31.5 78.36,31.5 77.72,30.86 J47.4 77.72,27.43 76.99,26.69 J48.4
SCL16
  Top 0.305: J49.4 17.78,38.86 17.02,39.62 8.26,39.62 7.62,38.99 J50.4 7.62,35.56 6.88,34.82 J51.4
SCL17
  Top 0.305: J52.4 41.15,38.86 40.39,39.62 31.62,39.62 30.99,38.99 J53.4 30.99,35.56 30.25,34.82 J54.4
SCL18
  Top 0.305: J55.4 64.52,38.86 63.75,39.62 54.99,39.62 54.36,38.99 J56.4 54.36,35.56 53.62,34.82 J57.4
SCL19
  Top 0.305: J58.4 87.88,38.86 87.12,39.62 78.36,39.62 77.72,38.99 J59.4 77.72,35.56 76.99,34.82 J60.4
SCL20
  Top 0.305: J61.4 17.78,46.99 17.02,47.75 8.26,47.75 7.62,47.12 J62.4 7.62,43.69 6.88,42.95 J63.4
SCL21
  Top 0.305: J64.4 41.15,46.99 40.39,47.75 31.62,47.75 30.99,47.12 J65.4 30.99,43.69 30.25,42.95 J66.4
SCL22
  Top 0.305: J67.4 64.52,46.99 63.75,47.75 54.99,47.75 54.36,47.12 J68.4 54.36,43.69 53.62,42.95 J69.4
SCL23
  Top 0.305: J70.4 87.88,46.99 87.12,47.75 78.36,47.75 77.72,47.12 J71.4 77.72,43.69 76.99,42.95 J72.4
SCL24
  Top 0.305: J73.4 17.78,55.12 17.02,55.88 8.26,55.88 7.62,55.24 J74.4 7.62,51.82 6.88,51.08 J75.4
SCL25
  Top 0.305: J76.4 41.15,55.12 40.39,55.88 31.62,55.88 30.99,55.24 J77.4 30.99,51.82 30.25,51.08 J78.4
SCL26
  Top 0.305: J79.4 64.52,55.12 63.75,55.88 54.99,55.88 54.36,55.24 J80.4 54.36,51.82 53.62,51.08 J81.4
SCL27
  Top 0.305: J82.4 87.88,55.12 87.12,55.88 78.36,55.88 77.72,55.24 J83.4 77.72,51.82 76.99,51.08 J84.4
SCL28
  Top 0.305: J85.4 17.78,63.25 17.02,64.01 8.26,64.01 7.62,63.37 J86.4 7.62,59.94 6.88,59.21 J87.4
SCL29
  Top 0.305: J88.4 41.15,63.25 40.39,64.01 31.62,64.01 30.99,63.37 J89.4 30.99,59.94 30.25,59.21 J90.4
SCL30
  Top 0.305: J91.4 64.52,63.25 63.75,64.01 54.99,64.01 54.36,63.37 J92.4 54.36,59.94 53.62,59.21 J93.4
SCL31
  Top 0.305: J94.4 87.88,63.25 87.12,64.01 78.36,64.01 77.72,63.37 J95.4 77.72,59.94 76.99,59.21 J96.4
SDA
  Top 0.305: J3.3 16.9,4.31 16.64,4.57 16.64,5.97 16.13,6.48 10.54,6.48 10.16,6.1 J4.3 10.16,2.29 9.4,1.52 4.06,1.52 3.68,1.91 3.68,2.92 4.07,3.31 J1.3
SDA1
  Top 0.305: J2.3 40.27,4.31 40.01,4.57 40.01,5.97 39.5,6.48 33.91,6.48 33.53,6.1 J5.3 33.53,2.29 32.77,1.52 27.43,1.52 27.05,1.91 27.05,2.92 27.44,3.31 J6.3
SDA2
  Top 0.305: J7.3 63.63,4.31 63.37,4.57 63.37,5.97 62.87,6.48 57.28,6.48 56.9,6.1 J8.3 56.9,2.29 56.13,1.52 50.8,1.52 50.42,1.91 50.42,2.92 50.81,3.31 J9.3
SDA3
  Top 0.305: J10.3 87,4.31 86.74,4.57 86.74,5.97 86.23,6.48 80.64,6.48 80.26,6.1 J11.3 80.26,2.29 79.5,1.52 74.17,1.52 73.79,1.91 73.79,2.92 74.18,3.31 J12.3
SDA4
  Top 0.305: J13.3 16.9,12.44 16.64,12.7 16.64,14.1 16.13,14.61 10.54,14.61 10.16,14.22 J14.3 10.16,10.41 9.4,9.65 4.06,9.65 3.68,10.03 3.68,11.05 4.07,11.44 J15.3
SDA5
  Top 0.305: J16.3 40.27,12.44 40.01,12.7 40.01,14.1 39.5,14.61 33.91,14.61 33.53,14.22 J17.3 33.53,10.41 32.77,9.65 27.43,9.65 27.05,10.03 27.05,11.05 27.44,11.44 J18.3
SDA6
  Top 0.305: J19.3 63.63,12.44 63.37,12.7 63.37,14.1 62.87,14.61 57.28,14.61 56.9,14.22 J20.3 56.9,10.41 56.13,9.65 50.8,9.65 50.42,10.03 50.42,11.05 50.81,11.44 J21.3
SDA7
  Top 0.305: J22.3 87,12.44 86.74,12.7 86.74,14.1 86.23,14.61 80.64,14.61 80.26,14.22 J23.3 80.26,10.41 79.5,9.65 74.17,9.65 73.79,10.03 73.79,11.05 74.18,11.44 J24.3
SDA8
  Top 0.305: J25.3 16.9,20.57 16.64,20.83 16.64,22.23 16.13,22.73 10.54,22.73 10.16,22.35 J26.3 10.16,18.54 9.4,17.78 4.06,17.78 3.68,18.16 3.68,19.18 4.07,19.57 J27.3
SDA9
  Top 0.305: J28.3 40.27,20.57 40.01,20.83 40.01,22.23 39.5,22.73 33.91,22.73 33.53,22.35 J29.3 33.53,18.54 32.77,17.78 27.43,17.78 27.05,18.16 27.05,19.18 27.44,19.57 J30.3
SDA10
  Top 0.305: J31.3 63.63,20.57 63.37,20.83 63.37,22.23 62.87,22.73 57.28,22.73 56.9,22.35 J32.3 56.9,18.54 56.13,17.78 50.8,17.78 50.42,18.16 50.42,19.18 50.81,19.57 J33.3
SDA11
  Top 0.305: J34.3 87,20.57 86.74,20.83 86.74,22.23 86.23,22.73 80.64,22.73 80.26,22.35 J35.3 80.26,18.54 79.5,17.78 74.17,17.78 73.79,18.16 73.79,19.18 74.18,19.57 J36.3
SDA12
  Top 0.305: J37.3 16.9,28.69 16.64,28.96 16.64,30.35 16.13,30.86 10.54,30.86 10.16,30.48 J38.3 10.16,26.67 9.4,25.91 4.06,25.91 3.68,26.29 3.68,27.3 4.07,27.69 J39.3
SDA13
  Top 0.305: J40.3 40.27,28.69 40.01,28.96 40.01,30.35 39.5,30.86 33.91,30.86 33.53,30.48 J41.3 33.53,26.67 32.77,25.91 27.43,25.91 27.05,26.29 27.05,27.3 27.44,27.69 J42.3
SDA14
  Top 0.305: J43.3 63.63,28.69 63.37,28.96 63.37,30.35 62.87,30.86 57.28,30.86 56.9,30.48 J44.3 56.9,26.67 56.13,25.91 50.8,25.91 50.42,26.29 50.42,27.3 50.81,27.69 J45.3
SDA15
  Top 0.305: J46.3 87,28.69 86.74,28.96 86.74,30.35 86.23,30.86 80.64,30.86 80.26,30.48 J47.3 80.26,26.67 79.5,25.91 74.17,25.91 73.79,26.29 73.79,27.3 74.18,27.69 J48.3
SDA16
  Top 0.305: J49.3 16.9,36.82 16.64,37.08 16.64,38.48 16.13,38.99 10.54,38.99 10.16,38.61 J50.3 10.16,34.8 9.4,34.04 4.06,34.04 3.68,34.42 3.68,35.43 4.07,35.82 J51.3
SDA17
  Top 0.305: J52.3 40.27,36.82 40.01,37.08 40.01,38.48 39.5,38.99 33.91,38.99 33.53,38.61 J53.3 33.53,34.8 32.77,34.04 27.43,34.04 27.05,34.42 27.05,35.43 27.44,35.82 J54.3
SDA18
  Top 0.305: J55.3 63.63,36.82 63.37,37.08 63.37,38.48 62.87,38.99 57.28,38.99 56.9,38.61 J56.3 56.9,34.8 56.13,34.04 50.8,34.04 50.42,34.42 50.42,35.43 50.81,35.82 J57.3
SDA19
  Top 0.305: J58.3 87,36.82 86.74,37.08 86.74,38.48 86.23,38.99 80.64,38.99 80.26,38.61 J59.3 80.26,34.8 79.5,34.04 74.17,34.04 73.79,34.42 73.79,35.43 74.18,35.82 J60.3
SDA20
  Top 0.305: J61.3 16.9,44.95 16.64,45.21 16.64,46.61 16.13,47.12 10.54,47.12 10.16,46.74 J62.3 10.16,42.93 9.4,42.16 4.06,42.16 3.68,42.55 3.68,43.56 4.07,43.95 J63.3
SDA21
  Top 0.305: J64.3 40.27,44.95 40.01,45.21 40.01,46.61 39.5,47.12 33.91,47.12 33.53,46.74 J65.3 33.53,42.93 32.77,42.16 27.43,42.16 27.05,42.55 27.05,43.56 27.44,43.95 J66.3
SDA22
  Top 0.305: J67.3 63.63,44.95 63.37,45.21 63.37,46.61 62.87,47.12 57.28,47.12 56.9,46.74 J68.3 56.9,42.93 56.13,42.16 50.8,42.16 50.42,42.55 50.42,43.56 50.81,43.95 J69.3
SDA23
  Top 0.305: J70.3 87,44.95 86.74,45.21 86.74,46.61 86.23,47.12 80.64,47.12 80.26,46.74 J71.3 80.26,42.93 79.5,42.16 74.17,42.16 73.79,42.55 73.79,43.56 74.18,43.95 J72.3
SDA24
  Top 0.305: J73.3 16.9,53.08 16.64,53.34 16.64,54.74 16.13,55.24 10.54,55.24 10.16,54.86 J74.3 10.16,51.05 9.4,50.29 4.06,50.29 3.68,50.67 3.68,51.69 4.07,52.08 J75.3
SDA25
  Top 0.305: J76.3 40.27,53.08 40.01,53.34 40.01,54.74 39.5,55.24 33.91,55.24 33.53,54.86 J77.3 33.53,51.05 32.77,50.29 27.43,50.29 27.05,50.67 27.05,51.69 27.44,52.08 J78.3
SDA26
  Top 0.305: J79.3 63.63,53.08 63.37,53.34 63.37,54.74 62.87,55.24 57.28,55.24 56.9,54.86 J80.3 56.9,51.05 56.13,50.29 50.8,50.29 50.42,50.67 50.42,51.69 50.81,52.08 J81.3
SDA27
  Top 0.305: J82.3 87,53.08 86.74,53.34 86.74,54.74 86.23,55.24 80.64,55.24 80.26,54.86 J83.3 80.26,51.05 79.5,50.29 74.17,50.29 73.79,50.67 73.79,51.69 74.18,52.08 J84.3
SDA28
  Top 0.305: J85.3 16.9,61.21 16.64,61.47 16.64,62.87 16.13,63.37 10.54,63.37 10.16,62.99 J86.3 10.16,59.18 9.4,58.42 4.06,58.42 3.68,58.8 3.68,59.82 4.07,60.21 J87.3
SDA29
  Top 0.305: J88.3 40.27,61.21 40.01,61.47 40.01,62.87 39.5,63.37 33.91,63.37 33.53,62.99 J89.3 33.53,59.18 32.77,58.42 27.43,58.42 27.05,58.8 27.05,59.82 27.44,60.21 J90.3
SDA30
  Top 0.305: J91.3 63.63,61.21 63.37,61.47 63.37,62.87 62.87,63.37 57.28,63.37 56.9,62.99 J92.3 56.9,59.18 56.13,58.42 50.8,58.42 50.42,58.8 50.42,59.82 50.81,60.21 J93.3
SDA31
  Top 0.305: J94.3 87,61.21 86.74,61.47 86.74,62.87 86.23,63.37 80.64,63.37 80.26,62.99 J95.3 80.26,59.18 79.5,58.42 74.17,58.42 73.79,58.8 73.79,59.82 74.18,60.21 J96.3

## Text on the board
tPlace: SCL | SDA | 3.3V | GND | SCL | SDA | 3.3V | GND | SCL | SDA | 3.3V | GND | SCL | SDA | 3.3V | GND | SCL | SDA | 3.3V | GND | SCL | SDA | 3.3V | GND | SCL | SDA | 3.3V | GND | SCL | SDA | 3.3V | GND | SCL | SDA | 3.3V | GND | SCL | SDA | 3.3V | GND | SCL | SDA | 3.3V | GND | SCL | SDA | 3.3V | GND | SCL | SDA | 3.3V | GND | SCL | SDA | 3.3V | GND | SCL | SDA | 3.3V | GND | SCL | SDA | 3.3V | GND | SCL | SDA | 3.3V | GND | SCL | SDA | 3.3V | GND | SCL | SDA | 3.3V | GND | SCL | SDA | 3.3V | GND | SCL | SDA | 3.3V | GND | SCL | SDA | 3.3V | GND | SCL | SDA | 3.3V | GND | SCL | SDA | 3.3V | GND | SCL | SDA | 3.3V | GND | SCL | SDA | 3.3V | GND | SCL | SDA | 3.3V | GND | SCL | SDA | 3.3V | GND | SCL | SDA | 3.3V | GND | SCL | SDA | 3.3V | GND | SCL | SDA | 3.3V | GND | SCL | SDA | 3.3V | GND
bPlace: SCL | SDA | 3.3V | GND | SCL | SDA | 3.3V | GND | SCL | SDA | 3.3V | GND | SCL | SDA | 3.3V | GND | SCL | SDA | 3.3V | GND | SCL | SDA | 3.3V | GND | SCL | SDA | 3.3V | GND | SCL | SDA | 3.3V | GND | SCL | SDA | 3.3V | GND | SCL | SDA | 3.3V | GND | SCL | SDA | 3.3V | GND | SCL | SDA | 3.3V | GND | SCL | SDA | 3.3V | GND | SCL | SDA | 3.3V | GND | SCL | SDA | 3.3V | GND | SCL | SDA | 3.3V | GND | SCL | SDA | 3.3V | GND | SCL | SDA | 3.3V | GND | SCL | SDA | 3.3V | GND | SCL | SDA | 3.3V | GND | SCL | SDA | 3.3V | GND | SCL | SDA | 3.3V | GND | SCL | SDA | 3.3V | GND | SCL | SDA | 3.3V | GND | SCL | SDA | 3.3V | GND | SCL | SDA | 3.3V | GND | SCL | SDA | 3.3V | GND | SCL | SDA | 3.3V | GND | SCL | SDA | 3.3V | GND | SCL | SDA | 3.3V | GND | SCL | SDA | 3.3V | GND | SCL | SDA | 3.3V | GND
Milling: VScore | Adding a frame around the panel is acceptable